# EAGLE board Diseño_Placa1_v1 (EAGLE 9.7.0)
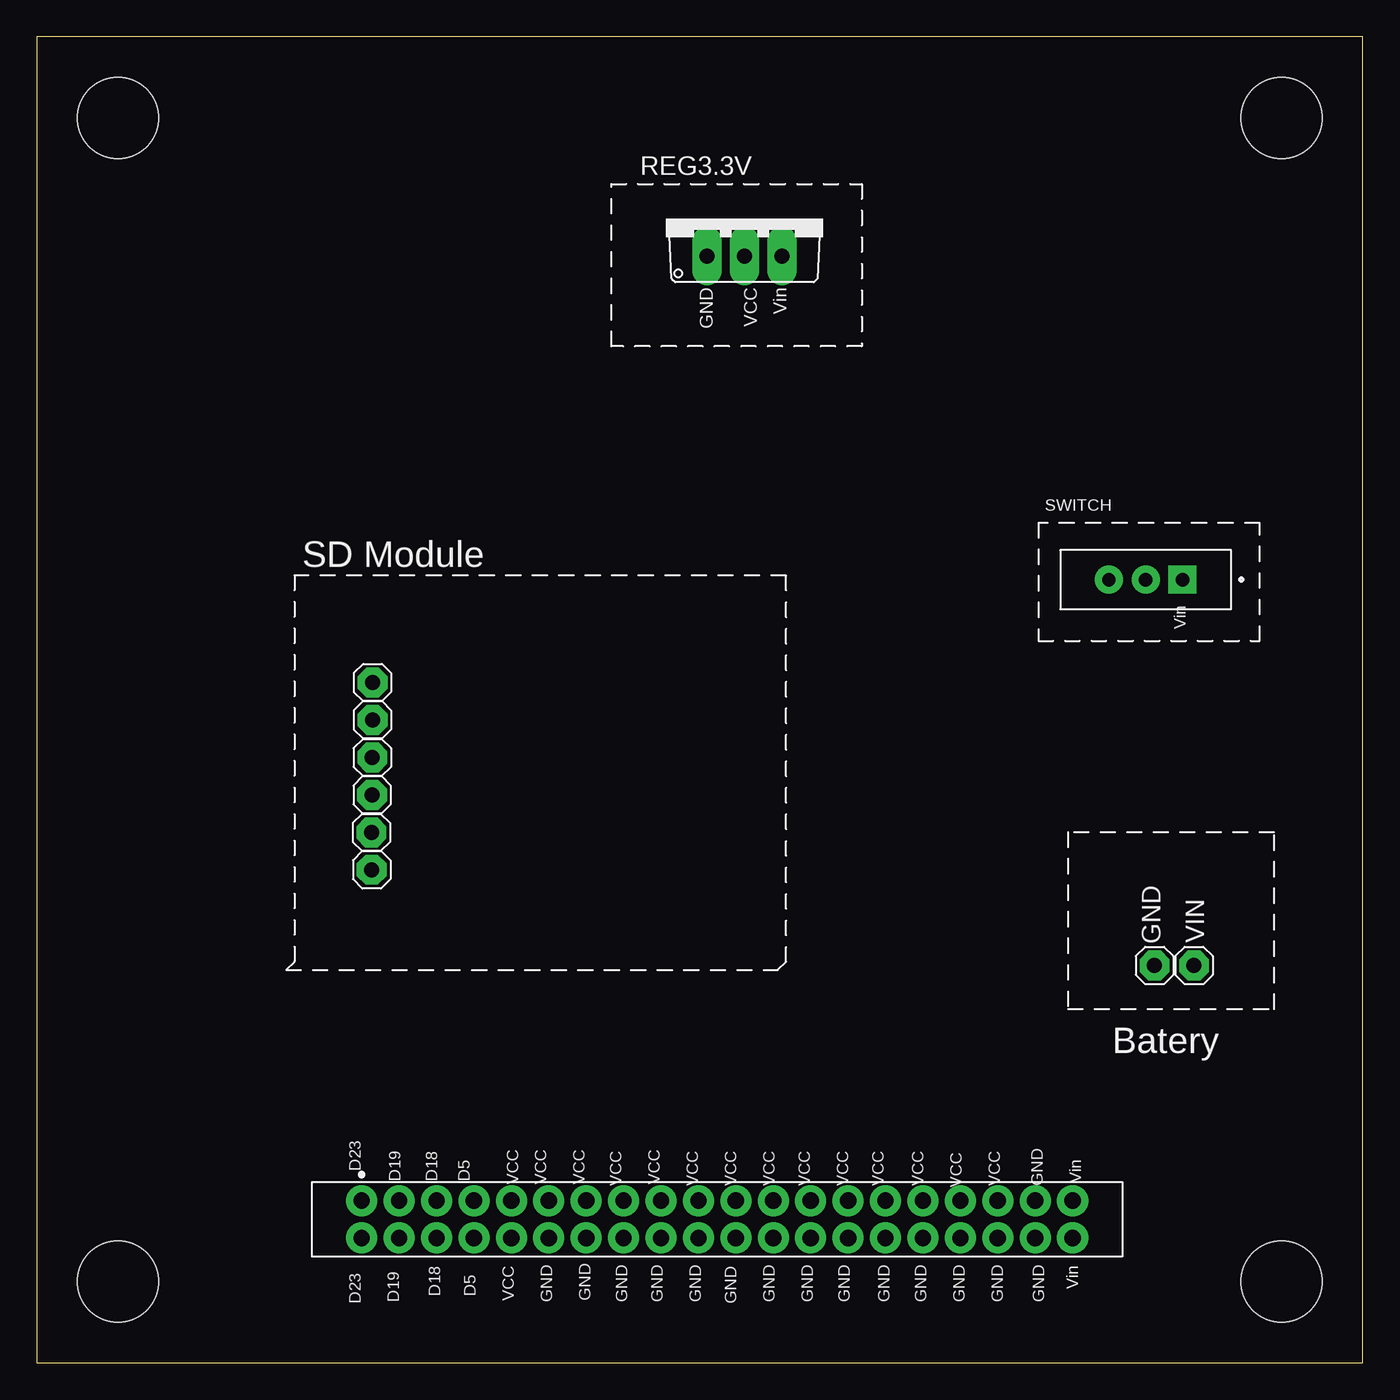
[diagram p0: board, top side]
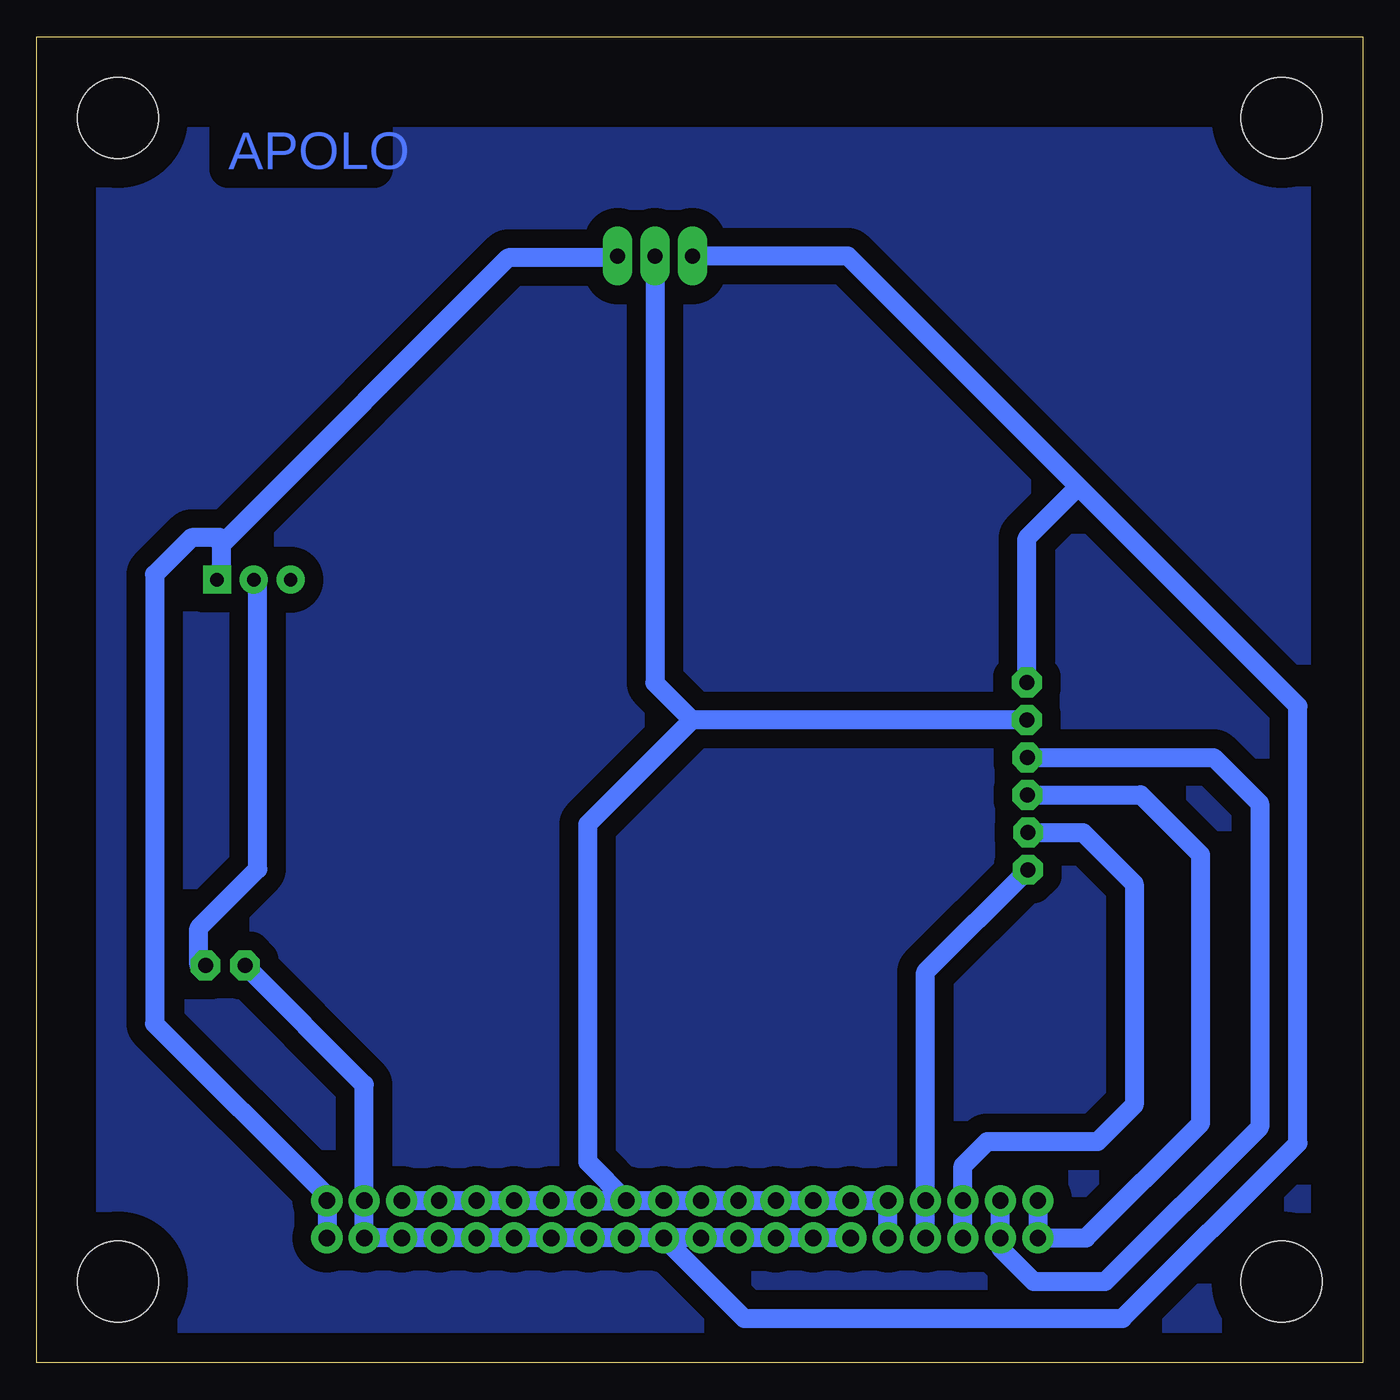
[diagram p1: board, bottom side, seen from below]

Size 90 x 90 mm. Coordinates in mm from the lower left corner, seen from the top.
Outline: 0,90 0,0 90,0 90,90 0,90
Copper layers (1*16): Top 0.035mm / dielectric 1.5mm / Bottom 0.035mm
Design rules "default *": minimum track width 1.3mm, minimum drill 0.1mm, track to track 0.8mm, track to pad 0.4mm, pad to pad 0.4mm, via to via 6mil, smd to smd 6mil, copper to edge 2mm, drill to drill 0.8mm, minimum pad ring 0.5mm, minimum via ring 0.25mm, stop-mask expansion 0.8mm, vias tented up to drill 0mil, thermal gap 0.4mm
Holes 5.5 mm at 5.5,5.5 5.5,84.5 84.5,84.5 84.5,5.5

## Footprints (pad centres in the part's own frame; a part is rotated, then mirrored left to right if it is on the bottom)
1X01 = drill 1.016 octagon: 1 0,0
TO220V = drill 1.016 long: 1 -2.54,-2.54; 2 0,-2.54; 3 2.54,-2.54
SW_MINI-SPDT-SW = drill 0.9 square: 1 -2.5,0 | drill 0.9: 2 0,0; 3 2.5,0
PINHEADER = drill 1.105 pad 1.705: 1 0,0; 2 2.54,0; 3 5.08,0; 4 7.62,0; 5 10.16,0; 6 12.7,0; 7 15.24,0; 8 17.78,0; 9 20.32,0; 10 22.86,0; 11 25.4,0; 12 27.94,0; 13 30.48,0; 14 33.02,0; 15 35.56,0; 16 38.1,0; 17 40.64,0; 18 43.18,0; 19 45.72,0; 20 48.26,0; 21 48.26,-2.54; 22 45.72,-2.54; 23 43.18,-2.54; 24 40.64,-2.54; 25 38.1,-2.54; 26 35.56,-2.54; 27 33.02,-2.54; 28 30.48,-2.54; 29 27.94,-2.54; 30 25.4,-2.54; 31 22.86,-2.54; 32 20.32,-2.54; 33 17.78,-2.54; 34 15.24,-2.54; 35 12.7,-2.54; 36 10.16,-2.54; 37 7.62,-2.54; 38 5.08,-2.54; 39 2.54,-2.54; 40 0,-2.54

## Placement (x,y rotation side)
GND  [1X01]  75.87,26.96 0 top
JP1  GND  [1X01]  22.79,46.17 0 top
JP2  VCC  [1X01]  22.79,43.63 0 top
JP3  MISO  [1X01]  22.77,41.08 0 top
JP4  MOSI  [1X01]  22.76,38.54 0 top
JP5  SCK  [1X01]  22.72,35.99 0 top
JP6  CS  [1X01]  22.73,33.46 0 top
REG3.3V  LD1117_TO220  [TO220V]  48.04,77.66 0 top
SWITCH  MINI-SPDT-SW  [SW_MINI-SPDT-SW]  75.27,53.15 180 top
U$1  PINHEADER  [PINHEADER]  22.05,11 0 top
VIN  [1X01]  78.55,26.96 0 top

## Library data of the parts
GND JP1-JP6 VIN = Connector; CATEGORY: Headers; DESCRIPTION: Header, Straight, 1 Position; MANUFACTURER: Generic; MPN: Generic; OPERATING_TEMPERATURE: Generic; PART_STATUS: Active; PITCH: 0.100" (2.54mm); ROHS_COMPLIANCE: Generic; SERIES: Generic; SUB-CATEGORY: Headers, Male Pins; TYPE: Board to Board or Cable, Unshrouded, Through Hole, Straight
REG3.3V = IC_Power-Management; CATEGORY: IC_Linear; DESCRIPTION: Adjustable voltage regulator; MANUFACTURER: STMicroelectronics; MPN: Generic; SERIES: LM1117; SUB-CATEGORY: Voltage Regulator; TYPE: Linear
SWITCH = MINI-SPDT-SW; AVAILABILITY: In Stock; CHECK_PRICES: https://www.snapeda.com/parts/MINI-SPDT-SW/Gravitech/view-part/?ref=eda; DESCRIPTION: Slide Switches MINI SPDT SWITCH; MF: Gravitech; MP: MINI-SPDT-SW; PACKAGE: None; PRICE: None; SNAPEDA_LINK: https://www.snapeda.com/parts/MINI-SPDT-SW/Gravitech/view-part/?ref=snap
U$1 = PINHEADER-40

## Nets
N$1: JP4.1 U$1.1 U$1.40
N$2: SWITCH.2 VIN.1
N$3: JP3.1 U$1.2 U$1.39
N$4: JP5.1 U$1.3 U$1.38
N$5: JP6.1 U$1.4 U$1.37
N$7: GND.1 JP1.1 REG3.3V.1 U$1.19 U$1.22 U$1.23 U$1.24 U$1.25 U$1.26 U$1.27 U$1.28 U$1.29 U$1.30 U$1.31 U$1.32 U$1.33 U$1.34 U$1.35
N$8: REG3.3V.3 SWITCH.1 U$1.20 U$1.21
N$9: JP2.1 REG3.3V.2 U$1.5 U$1.6 U$1.7 U$1.8 U$1.9 U$1.10 U$1.11 U$1.12 U$1.13 U$1.14 U$1.15 U$1.16 U$1.17 U$1.18 U$1.36

## Tracks (layer width: path | path; a pad name or v marks a point on that pad's centre or on a via)
N$1
  Bottom 1.3: JP4.1 15.07,38.54 11,34.47 11,16.25 18.79,8.46 U$1.40 U$1.1
N$2
  Bottom 1.3: SWITCH.2 75,53 75,33.5 79,29.5 79,27 VIN.1
N$3
  Bottom 1.3: JP3.1 10.11,41.08 7,37.97 7,15.99 17.49,5.5 22.33,5.5 24.59,7.76 U$1.39 U$1.2
N$4
  Bottom 1.3: JP5.1 18.99,35.99 15.5,32.5 15.5,17.5 18,15 25.5,15 27.13,13.37 U$1.3 U$1.38
N$5
  Bottom 1.3: U$1.37 U$1.4 29.67,26.52 JP6.1
N$6
  pour Bottom (isolate 1.27): 4.1,2.6 85.4,2.6 85.4,83.3 4.1,83.3
N$7
  Bottom 1.3: U$1.35 U$1.34 U$1.33 U$1.32 U$1.31 U$1.30 | U$1.30 U$1.29 U$1.28 U$1.27 U$1.26 U$1.25 U$1.24 U$1.23 U$1.22 U$1.19 67.77,18.86 GND.1 | U$1.30 41.99,3 16.3,3 4.4,14.9 4.4,44.57 19.29,59.47 | 19.29,59.47 34.95,75.12 REG3.3V.1 | JP1.1 22.79,55.97 19.29,59.47
N$8
  Bottom 1.3: 77.5,55.5 77.5,53.5 SWITCH.1 | 77.5,55.5 58,75 51,75 REG3.3V.3 | 77.5,55.5 77.5,56 79.5,56 82,53.5 82,23 70.31,11.31 U$1.20 U$1.21
N$9
  Bottom 1.3: REG3.3V.2 48.04,46.14 45.53,43.63 | U$1.36 U$1.5 U$1.6 U$1.7 U$1.8 U$1.9 U$1.10 U$1.11 U$1.12 | U$1.12 51.97,11 | U$1.12 U$1.13 U$1.14 U$1.15 U$1.16 U$1.17 U$1.18 | JP2.1 45.53,43.63 | 45.53,43.63 52.61,36.55 52.61,13.62 U$1.12

## Text on the board
Bottom: APOLO
tNames: GND | VCC | Vin | SD Module | Vin | Batery | D23 | D19 | D18 | D5 | VCC | VCC | VCC | VCC | VCC | VCC | VCC | VCC | VCC | VCC | VCC | VCC | VCC | VCC | GND | Vin | Vin | D23 | D19 | D18 | D5 | VCC | GND | GND | GND | GND | GND | GND | GND | GND | GND | GND | GND | GND | GND | GND